# Altium PCB FlexPCB2.PcbDoc (part 2 of 2)
Units mm, origin at the board's own origin, x right, y up, seen from the top; angles counter-clockwise.
Board outline 299.18 x 60.96 mm, 2 copper layers (Top Layer, Bottom Layer); 124 components, 64 nets, 409 pads, 134 vias.
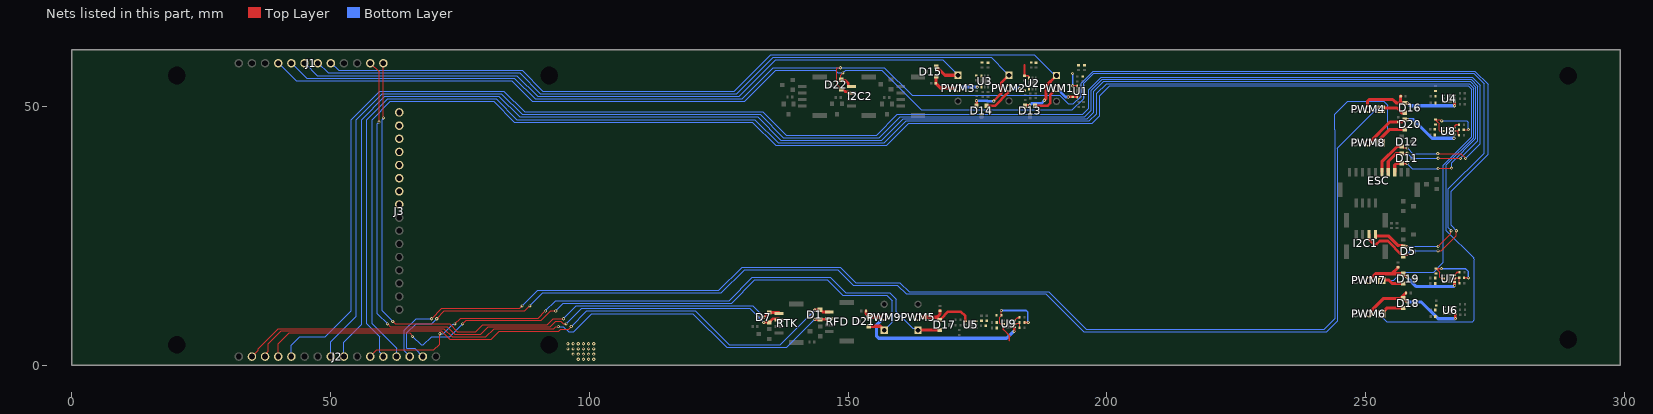
[diagram p2: the nets of this part, all layers, seen from the top]

## Via types
v1: diameter 0.6, hole 0.3, Top Layer to Bottom Layer, tented both sides, 134 vias

## Nets (pads, with @x,y where several pads share a name; then routed paths per layer and width w, separated by ;. In a path a pad name is that pad's centre, name@x,y a point inside that pad or via, vN(x,y) a via of type N, cw(c..) or ccw(c..) an arc to the next point about the centre after c; other vN are vias at no path point) (continued)
NetR19_1: R19.1 R20.2 U7.5 | length 11.3
  Top Layer w0.2: R19.1@263.637,18.675 264.35,17.962 264.35,17.053 264.589,16.814 265.011,16.814 U7.5@265.05,16.775
  Top Layer w0.3: R19.1@263.587,18.675 263.637,18.675 v1(264.65,18.675) ; R20.2@269.053,16.974 269.053,16.933 269.087,16.9 v1(269.85,16.9)
  Bottom Layer w0.3: v1(264.65,18.675) 269.3,18.675 269.85,18.125 v1(269.85,16.9)
NetR20_1: R20.1 R34.2 U7.2 | length 2
  Top Layer w0.2: U7.2@267.15,16.775 267.275,16.775 267.401,16.901 R20.1@268.087,16.901 R34.2@268.087,15.843
NetR21_2: R21.2 U7.3 | length 1.3
  Top Layer w0.3: U7.3@267.15,17.425 267.275,17.425 267.35,17.5 267.35,17.625 267.691,17.966 R21.2@268.111,17.966
NetR22_1: R22.1 R23.2 U8.5 | length 12.3
  Top Layer w0.2: R22.1@263.489,47.476 R22.1@263.499,47.476 ; v1(264.7,47.25) 264.609,47.25 264.383,47.476 263.564,47.476 R22.1@263.499,47.476 ; U8.5@264.95,45.275 264.34,45.275 264.223,45.392 264.223,46.755 263.975,47.003 263.962,47.003 263.564,47.401 263.564,47.41 R22.1@263.499,47.476 ; R23.2@268.855,45.501 269.823,45.501 v1(269.855,45.534)
  Bottom Layer w0.2: v1@264.712,47.262 264.737,47.238 269.567,47.238 269.8,47.004 v1@269.8,45.4
  Bottom Layer w0.3: v1(264.7,47.25) v1@264.712,47.262
NetR23_1: R23.1 R35.2 U8.2 | length 1.7
  Top Layer w0.2: U8.2@267.067,45.292 267.8,45.292 267.85,45.342 R23.1@267.85,45.385 ; R35.2@267.85,44.485 267.883,44.519 267.883,45.292 R23.1@267.883,45.352
NetR24_2: R24.2 U8.3 | length 1.2
  Top Layer w0.3: U8.3@267.05,45.925 267.162,45.925 267.237,46 267.237,46.237 267.47,46.47 267.824,46.47 R24.2@267.853,46.499
NetR25_1: R25.1 R26.2 U9.5 | length 11.5
  Top Layer w0.2: v1(179.6,10.6) 179.6,9.75 179.675,9.675 179.6,9.6 179.575,9.6 179.5,9.525 179.5,9.5 179.314,9.314 179.314,8.143 179.431,8.026 179.974,8.026 U9.5@180,8
  Top Layer w0.3: R26.2@184.075,8.278 184.778,8.278 v1(184.8,8.3)
  Bottom Layer w0.3: v1@179.5,10.6 184.425,10.6 184.7,10.325 v1@184.7,8.3
NetR26_1: R26.1 R36.2 U9.2 | length 2.2
  Top Layer w0.2: U9.2@182.1,8 182.108,8.008 182.583,8.008 182.703,8.128 183.025,8.128 183.125,8.228 R26.1@183.125,8.278 R36.2@183.125,7.25
NetR27_2: R27.2 U9.3 | length 1.4
  Top Layer w0.3: U9.3@182.1,8.65 182.225,8.65 182.25,8.675 182.25,8.743 182.723,9.216 183.075,9.216 183.125,9.266 R27.2@183.125,9.3
PWM1: D13.2 J1.5 PWM1.1 | length 156.7
  Top Layer w0.5: D13.2@184.2,50.15 184.281,50.231 185.056,50.231 v1(185.075,50.25)
  Top Layer w0.6: v1(187.925,51.225) 188.2,51.5 188.2,53.936 PWM1.1@190.271,56.007
  Bottom Layer w0.2: J1.5@50.04,58.5 51.54,57 87,57 91,53 128,53 135,60 186,60 PWM1.1@190,56
  Bottom Layer w0.5: v1(185.075,50.25) 185.094,50.269 185.145,50.269 185.501,50.625 187.325,50.625 v1(187.925,51.225)
PWM2: D14.2 J1.6 PWM2.1 | length 151
  Top Layer w0.5: v1(174.8,51.125) 174.813,51.113 174.813,50.163 D14.2@174.825,50.15 ; v1(178.136,51.063) 178.136,51.086 179.556,52.506 179.556,54.548 PWM2.1@181.077,56.069
  Bottom Layer w0.2: J1.6@47.5,58.5 49.5,56.5 86.5,56.5 90.5,52.5 128.5,52.5 135.5,59.5 177.645,59.5 180.477,56.669 PWM2.1@181.077,56.069
  Bottom Layer w0.5: v1(174.8,51.125) 176.836,51.125 176.899,51.063 v1(178.136,51.063)
PWM3: D15.2 J1.7 PWM3.1 | length 138
  Top Layer w0.6: D15.2@167,57.7 167.05,57.7 168.707,56.043 PWM3.1@171.238,56.043
  Bottom Layer w0.2: J1.7@44.96,58.5 47.46,56 86,56 90,52 129,52 136,59 168.282,59 PWM3.1@171.238,56.043
PWM4: D16.2 J2.2 PWM4.1 | length 246.9
  Top Layer w0.2: v1(70.5,9) 72,10.5 87.5,10.5 v1(88.5,11.5)
  Top Layer w0.6: PWM4.1@253,49.5 253.225,49.725 256.075,49.725 256.85,48.95 256.85,48.9 256.95,48.8 257,48.8
  Bottom Layer w0.2: J2.2@67.82,1.7 66.248,3.272 64.75,3.272 64.75,6.25 66.5,8 69.5,8 v1(70.5,9) ; v1(88.5,11.5) 91,14 125.5,14 130,18.5 148,18.5 151,15.5 159.5,15.5 161.2,13.8 188.2,13.8 195.5,6.5 242.5,6.5 244.5,8.5 244.5,41.9 252.075,49.475 252.975,49.475 PWM4.1@253,49.5
PWM5: D17.2 J2.6 PWM5.1 | length 123.2
  Top Layer w0.2: J2.6@57.66,1.7 58.935,2.975 69.975,2.975 71.1,4.1 v1(71.1,6.1) ; v1(74,8) 75.1,9.1 90.1,9.1 v1(91.5,10.5)
  Top Layer w0.3: PWM5.1@163.5,6.8 PWM5.1@163.55,6.85
  Top Layer w0.6: PWM5.1@163.55,6.85 D17.2@167.7,6.85
  Bottom Layer w0.2: v1(71.1,6.1) 71.8,6.1 73.623,7.923 73.923,7.923 v1(74,8) ; v1(91.5,10.5) 93.5,12.5 127,12.5 131.5,17 146.5,17 149.5,14 158,14 159.25,12.75 159.25,10.398 162.498,7.15 163.15,7.15 PWM5.1@163.5,6.8
PWM6: D18.2 J2.5 PWM6.1 | length 346.9
  Top Layer w0.6: PWM6.1@253,9.975 254.075,11.05 D18.2@257.25,11.05
  Bottom Layer w0.2: J2.5@60.2,1.7 60.2,1.8 59.5,2.5 59.5,5.5 57,8 57,47.5 61,51.5 82,51.5 86,47.5 132,47.5 136.5,43 157,43 161.225,47.225 196.625,47.225 198.05,48.65 198.05,52.55 199.957,54.457 270.018,54.457 270.9,53.575 270.9,44.014 265.6,38.714 265.6,26.051 270.9,20.751 270.9,20.55 271.025,20.425 271.025,8.775 270.65,8.4 254.075,8.4 PWM6.1@252.5,9.975
PWM7: D19.2 J2.4 PWM7.1 | length 326.1
  Top Layer w0.6: PWM7.1@253.1,16.475 254.463,16.475 255.137,15.8 D19.2@257.25,15.8
  Bottom Layer w0.2: J2.4@62.74,1.7 62.74,3.26 58,8 58,47.45 61.55,51 81.5,51 85.5,47 131.5,47 136,42.5 157.5,42.5 161.75,46.75 197.175,46.75 198.625,48.2 198.625,52.125 200.557,54.057 269.793,54.057 270.5,53.35 270.5,44.18 265,38.68 265,19.874 263.126,18 257,18 255.4,16.4 PWM7.1@253.1,16.4
PWM8: D20.2 J2.3 PWM8.1 | length 260.6
  Top Layer w0.2: v1(69.5,9) 71.5,11 86.5,11 v1(87,11.5)
  Top Layer w0.6: PWM8.1@253,43 253,43.975 254.625,45.6 257,45.6
  Bottom Layer w0.2: J2.3@65.28,1.7 65.28,1.77 64.25,2.8 64.25,6.75 66.5,9 v1(69.5,9) ; v1(87,11.5) 90,14.5 125,14.5 129.5,19 148.5,19 151.5,16 160,16 161.8,14.2 188.8,14.2 196,7 242,7 244,9 244,45.5 244.006,45.506 244.006,48.506 246.5,51 253.5,51 254.25,50.25 254.25,45.225 253,43.975 PWM8.1@253,43
PWM9: D21.1 J2.13 PWM9.1 | length 139.4
  Top Layer w0.2: J2.13@39.88,1.7 39.88,4.13 42,6.25 65.258,6.25 65.8,5.708 v1(65.8,5.6) ; v1(75.5,8) 76.175,8.675 90.675,8.675 92.5,10.5 v1(93.5,10.5)
  Top Layer w0.6: D21.1@154,7.55 156.225,7.55 PWM9.1@156.975,6.8
  Bottom Layer w0.2: v1(65.8,5.6) 67.47,3.93 67.93,3.93 69.5,5.5 73,5.5 v1(75.5,8) ; v1(93.5,10.5) 95,12 127.5,12 132,16.5 146,16.5 149,13.5 157.5,13.5 158.5,12.5 158.5,8.325 PWM9.1@156.975,6.8
PWM10: D12.2 ESC.5 J2.12 | length 320.5
  Top Layer w0.2: D12.2@257,42.3 257.3,42 v1(258,42) ; v1(263.925,40.925) 268.375,40.925 v1(269.3,40)
  Top Layer w0.6: ESC.5@253.125,37.325 253.125,39.349 256.076,42.3 D12.2@257,42.3
  Bottom Layer w0.2: J2.12@42.42,1.7 42.42,3.92 44,5.5 49,5.5 54,10.5 54,47.5 59.5,53 83.5,53 87.5,49 133.5,49 138,44.5 155.5,44.5 159.5,48.5 195.3,48.5 196.5,49.7 196.5,53.296 198.862,55.657 270.593,55.657 272.1,54.15 272.1,42.8 v1(269.3,40) ; v1(258,42) 259.075,40.925 v1(263.925,40.925)
PWM11: D11.1 ESC.4 J2.9 | length 310
  Top Layer w0.2: D11.1@257,40.95 257.05,41 v1(258,41) ; v1@264.003,40.003 268.297,40.003 v1(268.3,40)
  Top Layer w0.6: ESC.4@254.375,37.325 254.375,39.375 255.95,40.95 D11.1@257,40.95
  Bottom Layer w0.2: J2.9@50.04,1.7 50.04,4.54 55,9.5 55,47.5 60,52.5 83,52.5 87,48.5 133,48.5 137.5,44 156,44 160.05,48.05 195.75,48.05 197,49.3 197,53.13 199.127,55.257 270.393,55.257 271.7,53.95 271.7,43.4 v1(268.3,40) ; v1(258,41) 258.995,40.005 v1(264.005,40.005)
PWM12: D11.2 ESC.3 J2.8 | length 306
  Top Layer w0.2: D11.2@257,39.05 D11.2@257.05,39 ; v1(264,38) 264.05,38.05 266.55,38.05 v1(266.6,38.1)
  Top Layer w0.3: D11.2@257.05,39 v1(258,39)
  Top Layer w0.6: ESC.3@255.625,37.325 255.625,38.699 255.976,39.05 D11.2@257,39.05
  Bottom Layer w0.2: J2.8@52.58,1.7 52.58,4.48 56,7.9 56,47.5 60.5,52 82.5,52 86.5,48 132.5,48 137,43.5 156.5,43.5 160.65,47.65 196.2,47.65 197.5,48.95 197.5,52.964 199.393,54.857 270.193,54.857 271.3,53.75 271.3,43.849 266.6,39.149 v1(266.6,38.1) ; v1(258,39) 259,38 v1(264,38)
RFD900_RX: D1.1 J2.15 RFD.2 | length 122.4
  Top Layer w0.2: J2.15@34.8,1.7 36,2.9 36,3.25 39.85,7.1 71.9,7.1 73.5,5.5 80,5.5 81.575,7.075 93.075,7.075 93.49,7.49 93.99,7.49 v1(94,7.5)
  Top Layer w0.5: v1(143.575,8.9) 143.613,8.862 144.588,8.862 144.625,8.825 144.738,8.938 146.237,8.938 RFD.2@146.35,9.05
  Bottom Layer w0.2: v1(94,7.5) 95,7.5 96,6.5 97,6.5 100.5,10 120,10 126.5,3.5 138.175,3.5 v1(143.575,8.9)
RFD900_TX: D1.2 J2.14 RFD.1 | length 120.8
  Top Layer w0.2: J2.14@37.34,1.7 37.34,2.092 37.93,2.682 37.93,4.18 40.45,6.7 71.349,6.7 73.049,5 81,5 82.6,6.6 94.1,6.6 94.5,7 96,7 v1(96.5,7.5)
  Top Layer w0.5: v1(143.55,10.675) 143.575,10.7 144.6,10.7 D1.2@144.625,10.725 ; D1.2@144.675,10.725 145.1,10.3 RFD.1@146.35,10.3
  Bottom Layer w0.2: v1(96.5,7.5) 99.5,10.5 120.5,10.5 127,4 136.875,4 v1(143.55,10.675)
RTK_RX: D7.1 J1.2 RTK.2 | length 132.3
  Top Layer w0.2: J1.2@57.66,58.375 59.35,56.685 v1(59.35,47) ; v1(61,8) 61.5,7.5 72.5,7.5 74,6 79,6 80.475,7.475 92.475,7.475 93.5,8.5 94.5,8.5 94.99,8.01 95.49,8.01 v1(95.5,8)
  Top Layer w0.5: v1(133.7,8.3) D7.1@134.725,8.3 ; D7.1@134.775,8.3 135.025,8.55 135.025,8.6 135.4,8.975 RTK.2@136.575,8.975
  Bottom Layer w0.2: v1(59.35,47) 59.35,46.983 59,46.633 59,10 v1(61,8) ; v1(95.5,8) 98.5,11 131,11 v1(133.7,8.3)
RTK_TX: D7.2 J1.1 RTK.1 | length 129.5
  Top Layer w0.2: v1(60.2,47.8) J1.1@60.2,58.375 ; v1(62,8.5) 62.5,8 73,8 74.5,6.5 78,6.5 79.375,7.875 91.875,7.875 93,9 v1(95,9)
  Top Layer w0.5: v1(133.75,9.325) 133.8,9.325 134.675,10.2 D7.2@134.725,10.2 134.738,10.212 136.562,10.212 RTK.1@136.575,10.225
  Bottom Layer w0.2: v1(60.2,47.8) 60.2,47.665 60,47.465 60,10.5 v1(62,8.5) ; v1(95,9) 95,9.016 97.484,11.5 131.575,11.5 v1(133.75,9.325)
SCL: D5.1 D22.2 I2C1.1 I2C2.1 J1.9 | length 300.7
  Top Layer w0.2: D22.2@148.682,55.174 148.592,55.263 148.592,56.092 v1(149,56.5) ; D5.1@257.25,22.95 257.6,23.074 257.927,23.074 v1(258.001,23) ; v1(264,23) 266.404,25.404 266.404,25.904 v1(266.5,26)
  Top Layer w0.5: D22.2@148.682,55.174 148.803,55.053 149.472,55.053 150.05,54.475 150.05,53.925 150.1,53.875 I2C2.1@150.65,53.875
  Top Layer w0.6: I2C1.1@251.903,25.024 254.376,25.024 256.276,23.124 257.115,23.124 D5.1@257.25,22.989
  Bottom Layer w0.2: J1.9@39.88,58.5 39.905,58.5 43.405,55 85,55 89,51 130,51 136,57 147.5,57 148,56.5 v1(149,56.5) 149.5,57 156.5,57 164.15,49.35 193.35,49.35 195.5,51.5 195.5,54.471 197.487,56.457 270.924,56.457 272.925,54.456 272.925,41.025 266,34.1 266,26.561 266.5,26.061 v1(266.5,26) ; v1(258.001,23) v1(264,23)
SDA: D5.2 D22.1 I2C1.2 I2C2.2 J1.8 | length 306.2
  Top Layer w0.2: v1(148.5,57.5) 147.942,57.5 147.825,57.383 147.825,54.275 148.65,53.45 D22.1@149,53.275 ; v1(263.975,22.1) 264.6,22.1 267.5,25 267.5,25.955 v1(267.544,25.999)
  Top Layer w0.5: D22.1@149,53.275 149.05,53.275 149.45,52.875 149.85,52.875 150.1,52.625 I2C2.2@150.65,52.625 ; I2C1.2@250.675,25.275 250.725,25.225 250.725,24.175 251.575,23.325 252.025,23.325 252.725,24.025 254.275,24.025 257.05,21.25 257.05,21.2 257.2,21.05 257.3,21.05 257.643,21.393 257.866,21.393 257.973,21.5 v1(258,21.5)
  Bottom Layer w0.2: J1.8@42.42,58.5 45.42,55.5 85.5,55.5 89.5,51.5 129.5,51.5 135.5,57.5 v1(148.5,57.5) 157,57.5 162.35,52.15 190.85,52.15 192.5,50.5 193.5,50.5 195,52 195,54.536 197.321,56.857 271.09,56.857 273.675,54.272 273.675,40.8 266.5,33.625 266.5,27.083 267.544,26.038 v1(267.544,25.999) ; v1(258,21.5) 258.6,22.1 v1(263.975,22.1)
SERVO_1: C11.1 D13.1 PWM1.2 U1.1 | length 11.1
  Top Layer w0.5: D13.1@186.1,50.15 188.532,50.15 189.025,50.643 189.025,52.261 PWM1.2@190.271,53.507 ; v1(192.55,51.85) 192.56,51.86 U1.1@194.276,51.86
  Bottom Layer w0.6: PWM1.2@190.349,53.5 191.999,51.85 v1(192.55,51.85)
SERVO_2: C12.1 D14.1 PWM2.2 U2.1 | length 8.3
  Top Layer w0.5: D14.1@176.725,50.15 178.39,50.15 180.917,52.677 180.917,53.409 PWM2.2@181.076,53.568
  Bottom Layer w0.6: PWM2.2@181.077,53.569 183.036,53.569 v1(183.169,53.435)
SERVO_3: C13.1 D15.1 PWM3.2 U3.1 | length 9.8
  Top Layer w0.6: D15.1@167,55.8 166.98,55.78 166.98,54.52 C13.1@166.96,54.5 167.917,53.543 PWM3.2@171.238,53.543
  Bottom Layer w0.6: PWM3.2@171.238,53.543 171.391,53.696 171.911,53.696 171.99,53.775 v1(174.95,53.775)
SERVO_4: C14.1 D16.1 PWM4.2 U4.1 | length 21.3
  Top Layer w0.5: U4.1@267.175,50.9 267.175,50.202 267.2,50.177 v1(267.2,50.15)
  Top Layer w0.6: PWM4.2@250.5,49.5 250.347,49.653 250.347,51.024 250.698,51.375 255.225,51.375 255.881,50.719 256.781,50.719 256.881,50.719 ; C14.1@256.79,52 256.721,51.931 256.721,50.879 256.881,50.719 ; D16.1@257.5,50.7 v1(258.065,50.7) ; D16.1@257.569,50.719 256.881,50.719
  Bottom Layer w0.6: v1(258.065,50.7) 258.615,50.15 v1(267.2,50.15)
SERVO_5: C15.1 D17.1 PWM5.2 U5.1 | length 12.9
  Top Layer w0.5: D17.1@167.7,8.75 167.75,8.75 167.9,8.9 167.9,8.95 169.325,10.375 171.75,10.375 172.634,9.491 U5.1@172.634,8.535
  Top Layer w0.6: PWM5.2@163.5,9.3 167.15,9.3 ; D17.1@167.7,8.75 167.15,9.3 ; C15.1@167.75,10.54 167.75,9.9 167.15,9.3
SERVO_6: C16.1 D18.1 PWM6.2 U6.1 | length 21.9
  Top Layer w0.5: v1(267.325,9.025) 267.35,9.05 U6.1@267.35,9.975
  Top Layer w0.6: PWM6.2@250.5,9.975 253.475,12.95 256.8,12.95 D18.1@256.833,12.983 ; D18.1@256.81,12.95 D18.1@257.25,12.95 257.35,12.85 257.46,12.85 258,12.31 v1(258,12.25) ; D18.1@256.97,13.18 C16.1@257.79,14
  Bottom Layer w0.6: v1(258,12.25) 260.75,12.25 264,9 267.3,9 v1(267.325,9.025)
SERVO_7: C7.1 D19.1 PWM7.2 U7.1 | length 20.7
  Top Layer w0.5: U7.1@267.15,16.125 267.162,16.112 267.162,15.438 v1(267.175,15.425)
  Top Layer w0.6: PWM7.2@250.6,16.4 251.9,17.7 255.075,17.7 ; C7.1@256.243,18.953 256.243,18.868 255.075,17.7 ; v1(258,17) 257.3,17.7 D19.1@257.25,17.7 255.075,17.7
  Bottom Layer w0.6: v1(258,17) 259.8,15.2 266.95,15.2 v1(267.175,15.425)
SERVO_8: C8.1 D20.1 PWM8.2 U8.1 | length 20
  Top Layer w0.6: PWM8.2@250.5,43 250.667,43 254.678,47.011 C8.1@256.221,47.011 ; C8.1@256.225,47.015 257.015,47.015 257.419,47.419 257.469,47.419 D20.1@257.569,47.519 257.576,47.512 v1(258.091,47.512)
  Bottom Layer w0.6: v1(258.091,47.512) 259.188,47.512 262.825,43.875 v1(267.075,43.875)
SERVO_9: C4.1 D21.2 PWM9.2 U9.1 | length 36.6
  Top Layer w0.3: v1(182.075,6.575) v1@182.1,6.6
  Top Layer w0.5: v1@182.1,6.6 U9.1@182.1,7.35
  Top Layer w0.6: C4.1@153.46,10.5 153.46,9.99 153.85,9.6 153.85,9.55 153.95,9.45 D21.2@154,9.45 ; D21.2@154.05,9.45 154.2,9.3 PWM9.2@156.975,9.3
  Bottom Layer w0.6: PWM9.2@156.975,9.3 155.45,7.775 155.45,5.7 155.925,5.225 180.625,5.225 v1@181.975,6.575
V_OUT_SERVO: C22.1 C23.1 C24.1 C25.1 C26.1 C27.1 C28.1 C29.1 C30.1 C31.1 C32.1 C33.1 C34.1 C35.1 C36.1 C37.1 C38.1 C39.1 J3.9 J3.10 J3.11 J3.12 J3.13 J3.14 J3.15 J3.16 R1.2 R4.2 R7.2 R10.2 R13.2 R16.2 R19.2 R22.2 R25.2 U1.6 U2.6 U3.6 U4.6 U5.6 U6.6 U7.6 U8.6 U9.6 | length 9.7
  Top Layer w0.3: U9.6@180,7.35 180.006,7.344 180.006,6.901 181.275,5.632 ; 181.175,4.775 181.175,5.632 ; 184.075,58.05 C24.1@184.075,55.96 184.747,55.96 184.923,55.784 184.923,55.557 U2.6@184.948,55.532 ; v1(193.375,54.025) 193.403,53.997 194.251,53.997 194.276,53.972 U1.6@194.276,53.97
  Bottom Layer w0.3: v1(193.375,54.025) v1(193.375,56.403)
  other v1: 97.85,1.175 98.85,1.175 99.85,1.175 100.85,1.175 96.85,2.175 97.85,2.175 98.85,2.175 99.85,2.175 100.85,2.175 95.85,3.175 96.85,3.175 97.85,3.175 98.85,3.175 99.85,3.175 100.85,3.175 95.85,4.175 96.85,4.175 97.85,4.175 98.85,4.175 99.85,4.175 100.85,4.175
pads on no net: D2.1 D6.1 D9.2 D23.2 D25.2 ESC.6 ESC.7

## Polygon pours and split planes (outlines as drawn)
GND on Top Layer "GND_L01_P136" (solid, pour order 136): 266.016,48.646 273.8,48.646 273.8,43.6 272.1,43.6 269.475,43.6 269.475,47.225 268.8,47.9 266.425,47.9
GND on Top Layer "GND_L01_P133" (solid, pour order 133): 266.675,57 269.675,57 273.7,52.975 273.7,50.125 269.625,50.125 269.625,53.45 268.3,54.775 266.675,54.775
GND on Top Layer "GND_L01_P118" (solid, pour order 118): 180.5,11 180.5,7.15 181.625,7.15 181.65,7.175 181.65,11
GND on Top Layer "GND_L01_P125" (solid, pour order 125): 262.875,13.825 266.475,13.825 266.825,13.475 266.825,9.775 265.775,9.775 265.775,12.925 265.425,13.275 262.875,13.275
V_OUT_SERVO on Top Layer "V_OUT_SERVO_L01_P140" (solid, pour order 140): 174.443,8.85 174.625,8.85 177.025,8.85 177.025,4.875 176.4,4.875 176.4,8.1 176.25,8.25 174.443,8.25
V_OUT_SERVO on Top Layer "V_OUT_SERVO_L01_P131" (solid, pour order 131): 193,58 193,56.35 193.175,56.175 195,56.175 195,55.525 195.7,55.525 195.675,56.1 195.704,56.566 193.665,56.584 193.557,56.695 193.557,58
GND on Top Layer "Top Layer-GND" (solid, pour order 97): 62,25 64.45,25 86.5,48 197.4,47.7 198.6,49 198.6,51.9 199.9,53.1 242.7,53.1 245.25,50.35 245.25,9.25 248.5,9.25 248.5,50.35 251.05,52.9 256.7,52.9 258.5,51.1 258.5,7 250.75,7 248.5,9.25 248.5,5.25 260.75,5.25 262.875,7.375 262.875,54.625 259.75,57.75 244.75,57.75 197.25,57.75 196,56.5 196,50 195.5,49.5 136.75,49.5 136.75,51.45 138.545,51.45 138.525,52.2 137.9,52.557 137.9,54.9 139,56 146,56 146,57.5 131.5,57.5 127.5,53.5 91.5,53.5 87.5,57.5 82.5,57.5 76.5,51.5 76.5,51 77,50.5 81.5,50.5 82,50 82,47.25 64.575,29.825 62,29.825
GND on Top Layer "GND" (solid, pour order 47): 142,49.5 142,50.5 143,50.5 143,56.25 146,56.25 147.425,54.825 147.425,52.575 147.925,52.075 147.925,51.35 146.25,51.35 146.25,49.5
SERVO_2 on Top Layer "SERVO_2_L01_P147" (solid, pour order 147): 182.856,53.236 182.856,53.698 183.412,53.698 183.785,53.325 184.475,53.325 184.76,53.7 185.11,53.7 185.11,53.124 184.533,52.825 183.557,52.825
SERVO_8 on Top Layer "SERVO_8_L01_P146" (solid, pour order 146): 266.751,44.806 267.36,44.806 267.36,43.583 266.751,43.583
GND on Top Layer "GND_L01_P065" (solid, pour order 65): 182.9,55.45 181.8,54.02 181.8,52.925 179.65,50.775 179.65,49.475 183.398,49.475 183.398,52.25 182.695,52.91 182.695,53.808 183.05,53.975 184.45,53.975 184.45,55.45
SERVO_3 on Top Layer "SERVO_3_L01_P144" (solid, pour order 144): 175.925,54.125 175.925,53.475 174.825,53.475 174.825,54.125
GND on Top Layer "GND_L01_P142" (solid, pour order 142): 177.45,8.925 177.45,8.894 177.45,6.881 178.075,6.881 178.075,8.925
GND on Top Layer "GND_L01_P112" (solid, pour order 112): 184.45,53.975 186.525,53.975 186.525,55 184.45,55
V_OUT_SERVO on Top Layer "V_OUT_SERVO_L01_P121" (solid, pour order 121): 263.1,53.325 263.829,53.325 263.902,51 263.1,51
V_OUT_SERVO on Top Layer "GND" (solid, pour order 104): 270.5,7.5 275,7.5 275,15 264.775,15 264.5,15.275 264.5,15.838 265.343,15.838 265.355,16.375 263.15,16.375 263.15,14.85 264,14 270.1,14 270.5,13.6
V_OUT_SERVO on Top Layer "Top Layer-V_OUT_SERVO" (solid, pour order 77): 64.5,40 82.5,58 270.5,58 275,53.5 275,12 275,7.5 270.5,7.5 267.875,4.875 95.05,4.875 95.05,0.5 274.5,0.5 279,5 279,54.25 272.75,60.5 74.5,60.5 64.5,50.5 62,50.5 62,30.125 64.5,30.125
GND on Top Layer "GND_L01_P143" (solid, pour order 143): 186.044,55.014 186.044,55.836 186.456,55.85 186.456,55.014
GND on Top Layer "GND_L01_P141" (solid, pour order 141): 173.1,8.93 173.1,7 174.25,7 174.237,8.93
V_OUT_SERVO on Top Layer "V_OUT_SERVO_L01_P139" (solid, pour order 139): 178.95,10.001 178.35,10.001 178.35,4.875 178.95,4.875
V_OUT_SERVO on Top Layer "V_OUT_SERVO_L01_P122" (solid, pour order 122): 263.138,18 263.8,18 263.8,16.587 263.8,16.375 263.204,16.375
GND on Top Layer "GND_L01_P135" (solid, pour order 135): 268.738,52.925 268.738,52.225 269.363,52.225 269.363,52.925
GND on Top Layer "GND_L01_P134" (solid, pour order 134): 268.775,50.825 268.775,50.125 269.35,50.125 269.35,50.825
GND on Top Layer "GND_L01_P120" (solid, pour order 120): 266.675,50.675 266.675,57 260.55,57 260.55,55 264.975,55 265.575,54.4 265.575,50.675
GND on Top Layer "GND_L01_P132" (solid, pour order 132): 176.762,57.775 176.762,57.25 181.888,57.25 182.11,57.026 182.075,54.375 182.9,55.45 182.687,55.7 182.687,57.425 182.337,57.775
+5 on Top Layer "Top Layer-+5 1" (solid, pour order 78): 62,15 64.551,15 64.551,15.503 68.04,18.992 107,19 111,15 145.5,15 145.5,18.5 113,18.5 109.499,22.001 68.999,22.001 68.5,22.5 68.5,24 87.608,43.057 156.5,43.057 156.5,45.975 85.8,45.975 64.425,24.6 62,24.6
GND on Top Layer "GND_L01_P129" (solid, pour order 129): 189.475,51.775 189.525,51.775 191.15,51.775 191.15,49.5 189.425,49.5
V_OUT_SERVO on Top Layer "V_OUT_SERVO_L01_P128" (solid, pour order 128): 265.25,44.825 265.25,44.375 263.75,44.375 263.75,44.825
V_OUT_SERVO on Top Layer "V_OUT_SERVO_L01_P127" (solid, pour order 127): 275,43.46 264.193,43.46 263.756,43.897 263.756,46.8 263.125,46.8 263.125,43.275 263.65,42.75 275,42.75
GND on Top Layer "GND_L01_P126" (solid, pour order 126): 263.025,48.675 266,48.675 266.425,47.9 266.475,44.375 265.468,44.375 265.468,47.707 265.125,48.05 262.875,48.05 262.875,48.675
V_OUT_SERVO on Top Layer "V_OUT_SERVO" (solid, pour order 100): 275.025,50 267.429,50 267.079,49.65 265.529,49.65 265.4,50.325 265.351,51.05 263.204,51.05 263.204,48.85 275.025,48.85
V_OUT_SERVO on Top Layer "V_OUT_SERVO_L01_P124" (solid, pour order 124): 263.3,4.875 263.3,11.825 264.05,11.825 264.05,10.225 265.575,10.225 265.575,4.875
GND on Top Layer "GND_L01_P123" (solid, pour order 123): 262.875,21.625 265.925,21.625 266.675,20.875 266.675,15.875 265.55,15.875 265.55,20.025 265.05,20.525 262.875,20.525
V_OUT_SERVO on Top Layer "V_OUT_SERVO_L01_P116" (solid, pour order 116): 172.542,58.025 172.542,56.175 173.117,55.6 175.967,55.6 175.967,56.325 173.842,56.325 173.492,56.612 173.492,58.025
GND on Top Layer "GND" (solid, pour order 69): 172.7,55.4 177.275,55.4 177.275,54.3 173.6,54.3 173.25,53.95 173.25,52.693 175.2,52.35 175.2,51.775 173.725,51.609 173.725,49.5 168.55,49.5 168.55,50.327 172.05,53.2 172.05,54.75
GND on Top Layer "GND_L01_P110" (solid, pour order 110): 194.1,50.4 196.029,50.385 196.029,49.529 196,49.5 194.1,49.5
GND on Top Layer "GND_L01_P109" (solid, pour order 109): 194.1,57.3 197.2,57.3 197.2,56.7 197.1,56.7 194.1,56.7
V_OUT_SERVO on Top Layer "V_OUT_SERVO_L01_P108" (solid, pour order 108): 194.081,58 194.081,57.675 196.1,57.675 196.1,58
GND on Top Layer "GND" (solid, pour order 59): 193,52.42 196.076,52.42 196.076,53.42 193,53.42
GND on Top Layer "GND" (solid, pour order 93): 173.1,8.925 173.1,11 178.2,11 178.2,8.925
GND on Top Layer "GND" (solid, pour order 72): 56,59.5 56,57.5 56,56.5 58.5,56 58.5,47 60.5,45 60.5,30.575 61.25,29.825 62,29.825 62,25 61.1,25 60.5,24.4 60.5,15.26 61.135,14.625 62,14.625 62,9.45 59.95,9.45 58.5,8 34.5,8 ccw(c34.5,7) 33.5,7 33.5,5.25 33.5,0.5 30.75,0.5 31,6 31,9 cw(c32.5,9) 32.5,10.5 50.5,10.5 53.5,13.5 53.5,49 50,52.5 38.5,52.5 38,53 38,56.5 38.5,57 50.85,57 51.5,57.65 51.5,59.5
GND on Top Layer "GND" (solid, pour order 102): 258.5,20 256.75,20 254.1,22.475 254.1,23.325 253.075,23.325 253.075,20.475 254.209,19.5 258.5,19.5
GND on Top Layer "GND" (solid, pour order 101): 258.5,29.05 258.45,29 255,29 254.5,29.5 253.5,29.5 253.25,29.25 253.25,26.75 253.425,26.575 254.075,26.575 254.5,27 258.5,27
GND on Top Layer "Top Layer-GND 1" (solid, pour order 74): 122.5,11 188.5,11 194.25,5.25 248.5,5.25 248.5,8.25 248.5,9.25 245.25,9.25 243,7 196,7 190,13 159.5,13 158,14.5 110.5,14.5 106.5,18.5 68.7,18.5 64.85,14.65 62.018,14.65 62.018,9.425 69.325,9.425 72.4,12.5 94.5,12.5 98.5,8.5 120,8.5
GND on Top Layer "GND" (solid, pour order 88): 148.25,11 148.25,7.5 147.5,6.75 145.5,6.75 145.5,6.25 147.75,4 151,4 152.75,4 152.75,11
+5 on Top Layer "Top Layer-+5" (solid, pour order 85): 145.5,14.973 158.75,14.973 159,14.973 160.75,13.223 190.5,13.223 196.5,7.223 243.223,7.223 245.25,9.25 245.25,24.473 245.5,24.723 246,24.723 246,26.723 244.75,26.723 244.25,26.223 244.25,9.45 242.5,7.7 197.773,7.7 191.373,14.1 162.1,14.1 159.977,16.223 148.5,16.223 146.25,18.473 145.5,18.473
GND on Top Layer "GND" (solid, pour order 80): 133.25,11 133.25,9.075 132,7.825 132,7.25 132.75,6.5 133.25,6.5 133.25,5.5 131.5,5.5 130.75,6.25 130.75,11
GND on Top Layer "GND" (solid, pour order 79): 138.5,11 138.5,7.4 137.7,6.6 135.75,6.6 135.75,5.95 138,4 141.25,4 143,4 143,11
GND on Top Layer "GND" (solid, pour order 53): 161,49.5 161,50.5 162,50.5 162,56.25 163.5,56.25 164.5,57.25 165.5,57.25 165.5,55.5 166.25,54.75 166.25,54.25 164.75,52.75 164.75,49.5
GND on Top Layer "GND" (solid, pour order 52): 151.5,49.5 151.5,50.5 152.5,50.5 152.5,56.25 155.5,56.25 157,54.75 157,52.5 157.35,52.15 157.35,51.25 155.75,51.25 155.75,49.5
GND on Top Layer "GND" (solid, pour order 51): 159.25,49.5 159.25,50.5 161,50.5 161,49.5
GND on Top Layer "GND" (solid, pour order 50): 149.75,49.5 149.75,50.5 151.5,50.5 151.5,49.5
GND on Top Layer "GND" (solid, pour order 46): 140.25,49.5 140.25,50.5 142,50.5 142,49.5
+5 on Bottom Layer "+5" (solid, pour order 86): 244.75,26.75 244.75,24.75 247.25,24.75 249.75,27.25 249.75,29.75 247.75,29.75 247.25,29.25
V_OUT_SERVO on Bottom Layer "GND" (solid, pour order 76): 64.5,50.5 62,50.5 62,30.5 64.5,30.5 67,28 78,17 78,9 84.5,2.5 86.75,0.25 95.05,0.25 95.062,4.987 83.5,11.562 83.5,21 64.5,40
V_OUT_SERVO on Bottom Layer "V_OUT_SERVO_L02_P130" (solid, pour order 130): 95.05,4.975 95.075,5 101.7,5 101.7,0.275 101.675,0.25 95.05,0.25
no net on Layer0 "Default Coverlay 2 Top" (split plane): 299.175,0 299.175,60.96 14.8,60.96 0,60.96 0,0 13.316,0
no net on Layer0 "Default Coverlay 2 Bottom" (split plane): 299.175,0 299.175,60.96 14.8,60.96 0,60.96 0,0 13.316,0

## Keep-outs
Keep-Out Layer:
  lines w0.013: 161.136,44.274 161.136,43.399 cw(c159.136,43.399) 159.136,41.399 134.366,41.399 134.366,19.399 159.136,19.399 cw(c159.136,17.399) 161.136,17.399 161.136,16.524 ccw(c163.136,16.524) 163.136,14.524 197.136,14.524 cw(c197.136,12.524) 199.136,12.524 199.136,10.174 ccw(c201.136,10.174) 201.136,8.174 241.586,8.174 ccw(c241.586,10.174) 243.586,10.174 243.586,50.624 ccw(c241.586,50.624) 241.586,52.624 201.136,52.624 ccw(c201.136,50.624) 199.136,50.624 199.136,48.274 cw(c197.136,48.274) 197.136,46.274 163.136,46.274

## Other copper
Top Layer:
  pour cut-out: 198.876,9.14 198.878,9.142 198.878,9.143
Multi-Layer:
  pour cut-out: 161.136,44.274 cw(c163.136,44.274) 163.136,46.274 197.136,46.274 ccw(c197.136,48.274) 199.136,48.274 199.136,50.624 cw(c201.136,50.624) 201.136,52.624 241.586,52.624 cw(c241.586,50.624) 243.586,50.624 243.586,10.174 cw(c241.586,10.174) 241.586,8.174 201.136,8.174 cw(c201.136,10.174) 199.136,10.174 199.136,12.524 ccw(c197.136,12.524) 197.136,14.524 163.136,14.524 cw(c163.136,16.524) 161.136,16.524 161.136,17.399 ccw(c159.136,17.399) 159.136,19.399 134.366,19.399 134.366,41.399 159.136,41.399 ccw(c159.136,43.399) 161.136,43.399

## Silkscreen, mask and mechanical layers (free items; w line width, h text height)
Top Overlay:
  text "PWM" at 43.691,55.506 h2.5
  text "RTK" at 56.331,55.506 h2.5
  text "CAN" at 30.756,55.477 h2.5
  text "I2C" at 39.359,55.475 h2.5
  text "GND" at 51.206,55.475 h2.5
  text "DSHOT RX" at 35.375,54.956 h1.6
  text "FLEX PCB" at 106.7,34.316 h3
  text "Dec. 2025" at 106.7,32.1 h3
  text "6V" at 61.7,30.162 h3 r90
  text "Matthew Sugiamto" at 106.7,29.806 h2.5
  text "GND" at 61.7,25.013 h3 r90
  text "5V" at 61.7,15 h3 r90
  text "GND" at 61.7,9.813 h3 r90
  text "GND" at 30.102,3.399 h2.5
  text "RFD" at 33.975,3.399 h2.5
  text "PWM" at 38.531,3.399 h2.5
  text "ELRS" at 43.725,3.399 h2.5
  text "PWM" at 48.887,3.399 h2.5
  text "BATT CURR" at 56.325,3.399 h2 r90
  text "PWM" at 56.475,3.399 h2.5
  text "BATT VOLT" at 71.825,3.399 h2 r90
Mechanical 1:
  lines w0.013: 0,1.651 292.1,1.651 292.1,59.147 0,59.147 0,1.651

## Text inside footprints (layer, text, board x,y; h text height)
ESC: Mechanical 13 "1" at 258.1,38.6 h0.61; Mechanical 13 "10" at 246.5,38.6 h0.61; Top Overlay "10" at 246.5,38.6 h0.61